# Altium PCB somiqboard.PcbDoc (part 7 of 10)
Units mm, origin at the board's own origin, x right, y up, seen from the top; angles counter-clockwise.
Board outline 110 x 96 mm, 4 copper layers (Top Layer, Ground_Plane, Power_Plane, Bottom Layer), stack 1.454 mm thick; 221 components, 356 nets, 1185 pads, 539 vias.
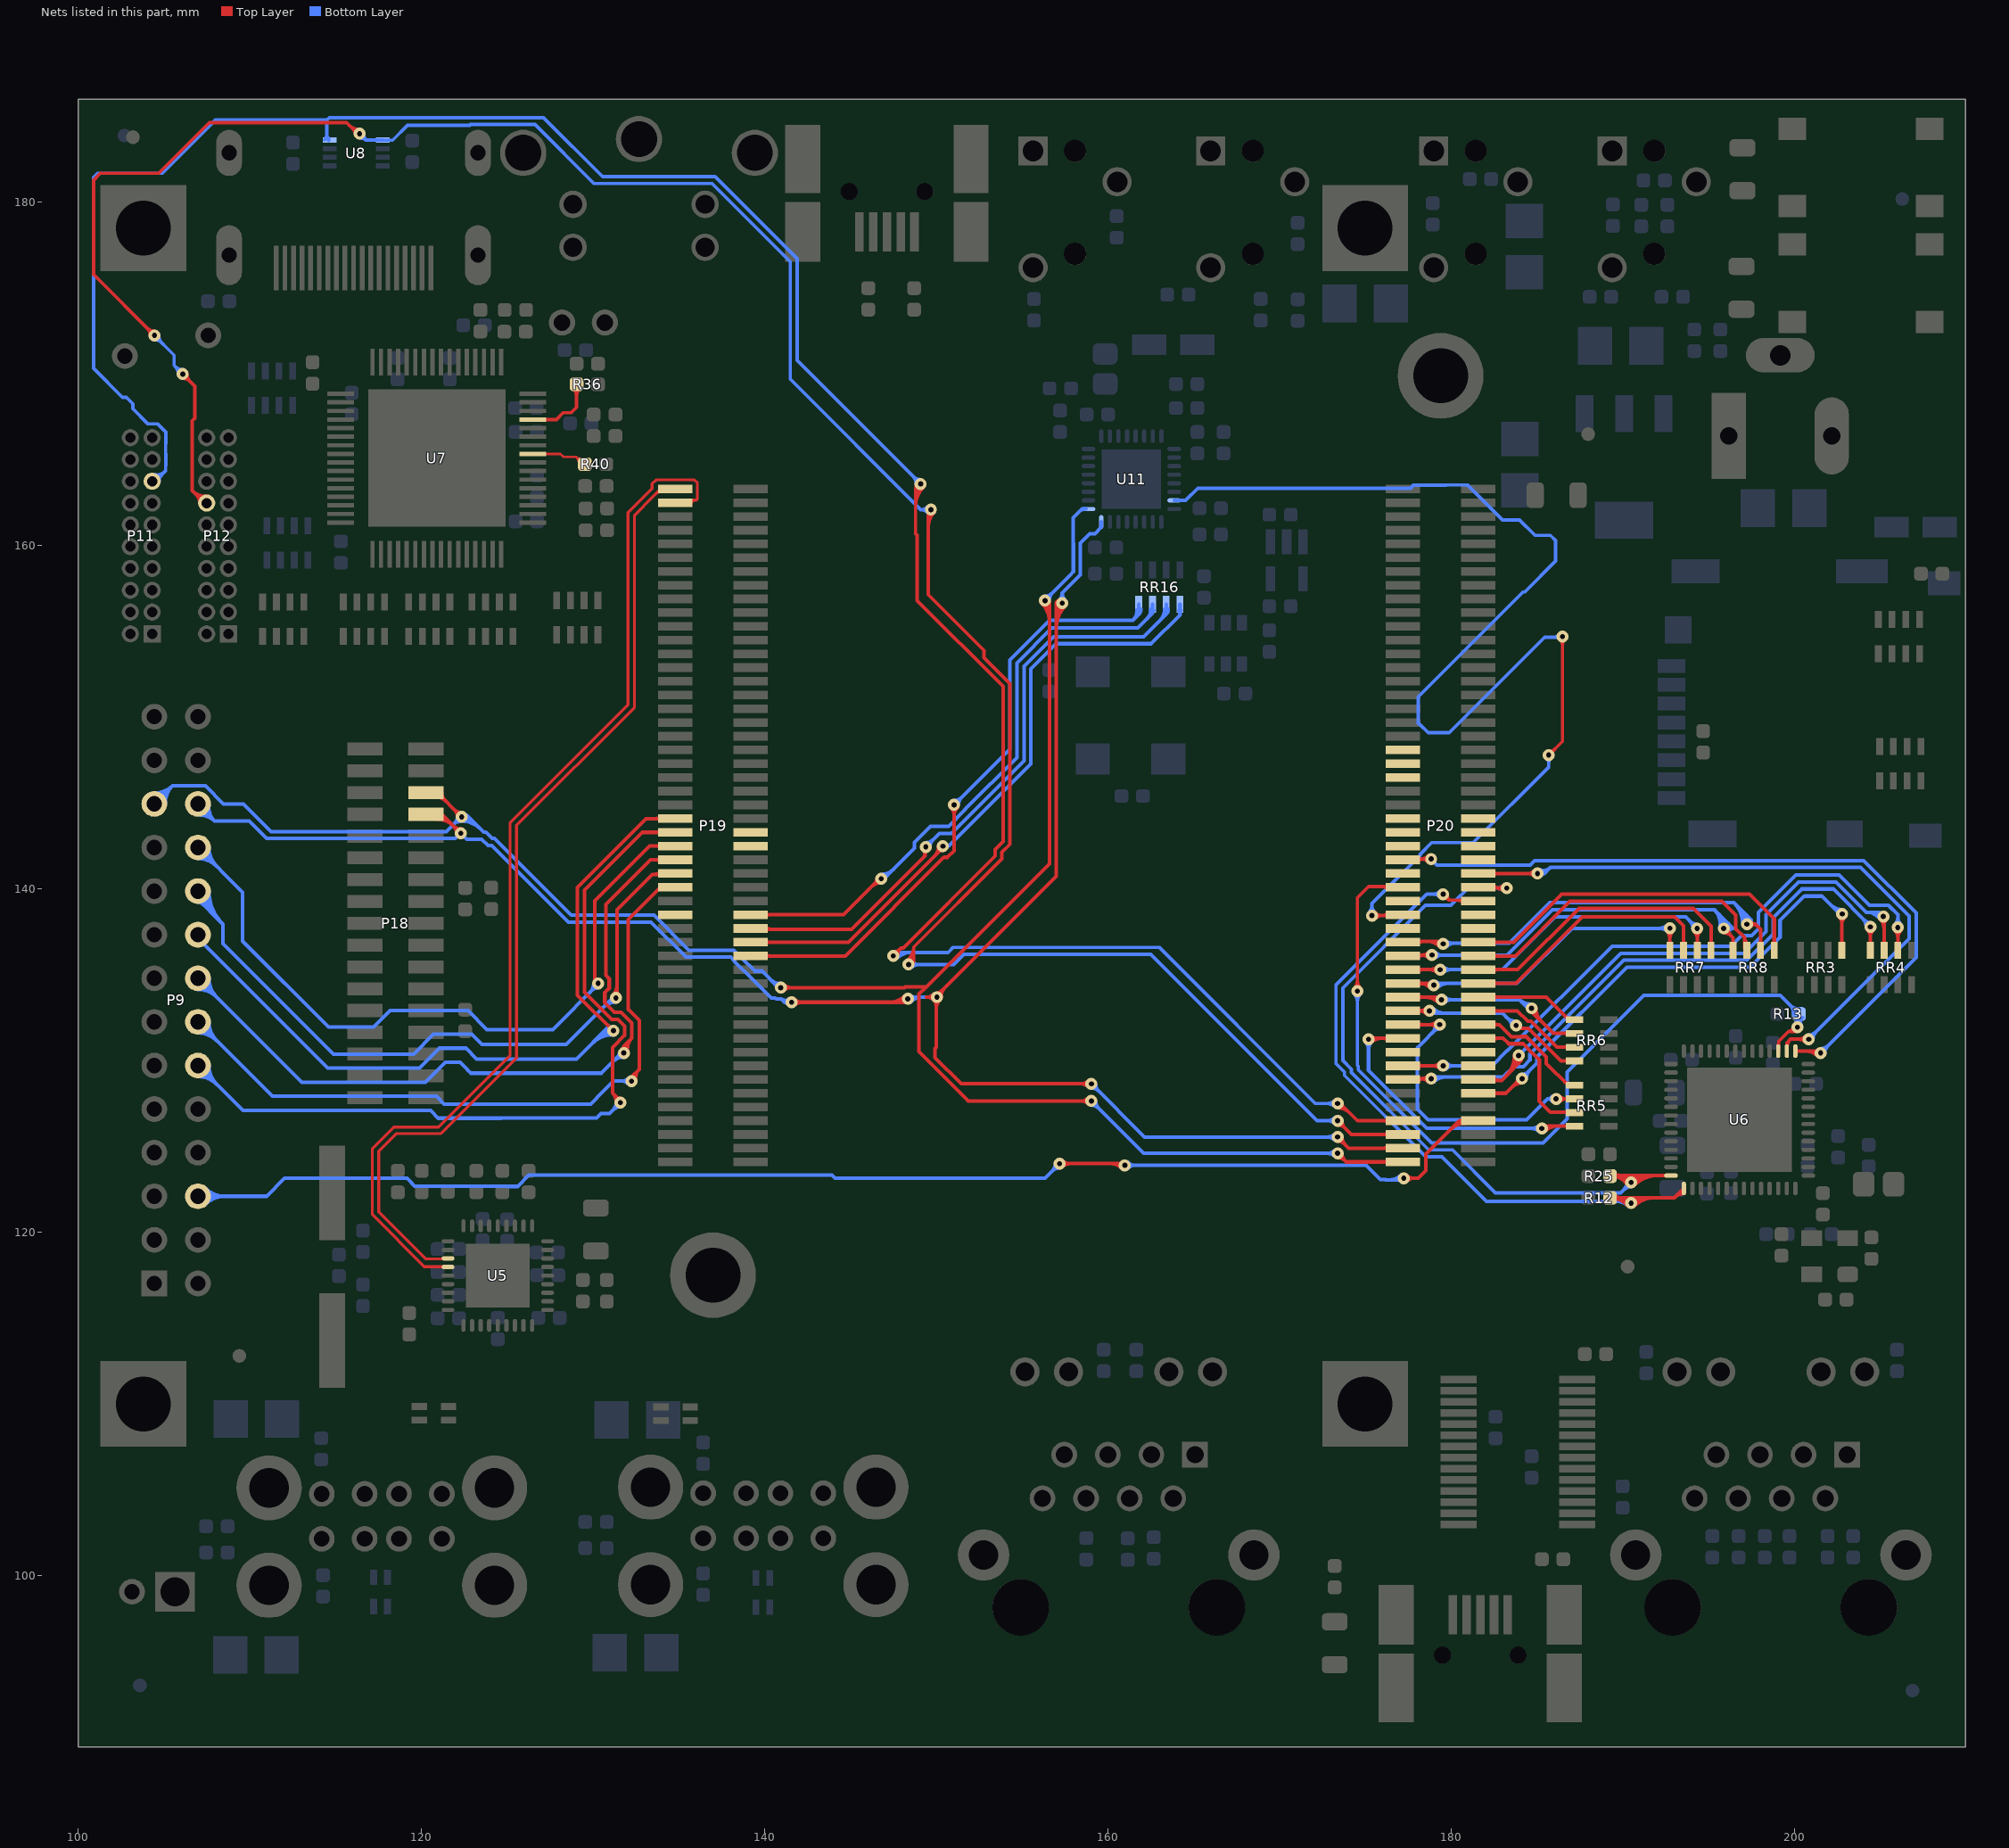
[diagram p9: the nets of this part, all layers, seen from the top]

## Via types
v1: diameter 0.7/0.7/0.7/0.7 (per signal layer), hole 0.3, Top Layer to Bottom Layer, tented both sides, 270 vias
v2: diameter 0.8, hole 0.3, Top Layer to Bottom Layer, tented both sides, 49 vias
v3: diameter 0.6/0.7/0.7/0.6 (per signal layer), hole 0.3, Top Layer to Bottom Layer, tented both sides, 47 vias
v4: diameter 0.6, hole 0.3, Top Layer to Bottom Layer, tented both sides, 43 vias
v5: diameter 1.1/1.1/1.1/1.1 (per signal layer), hole 0.6, Top Layer to Bottom Layer, tented both sides, 32 vias
v6: diameter 0.8/0.8/0.8/0.8 (per signal layer), hole 0.4, Top Layer to Bottom Layer, tented both sides, 31 vias
v7: diameter 0.9/0.9/0.9/0.9 (per signal layer), hole 0.5, Top Layer to Bottom Layer, tented both sides, 29 vias
v8: diameter 1.5/1.5/1.5/1.5 (per signal layer), hole 0.9, Top Layer to Bottom Layer, tented both sides, 14 vias
v9: diameter 1.2/1.2/1.2/1.2 (per signal layer), hole 0.6, Top Layer to Bottom Layer, tented both sides, 10 vias
v10: diameter 0.8/0.8/0.8/0.8 (per signal layer), hole 0.5, Top Layer to Bottom Layer, tented both sides, 6 vias
v11: diameter 1/1/1/1 (per signal layer), hole 0.5, Top Layer to Bottom Layer, tented both sides, 3 vias
v12: diameter 0.8/0.8/0.8/0.8 (per signal layer), hole 0.8, Top Layer to Bottom Layer, tented both sides, 2 vias
v13: diameter 1.2/1.2/1.2/1.2 (per signal layer), hole 1.2, Top Layer to Bottom Layer, tented both sides, 2 vias
v14: diameter 0.6/0.6/0.6/0.6 (per signal layer), hole 0.3, Top Layer to Bottom Layer, tented both sides, 1 vias

## Nets (pads, with @x,y where several pads share a name; then routed paths per layer and width w, separated by ;. In a path a pad name is that pad's centre, name@x,y a point inside that pad or via, vN(x,y) a via of type N, cw(c..) or ccw(c..) an arc to the next point about the centre after c; other vN are vias at no path point) (continued)
GPMC_A4: P20.89 RR3.5 | length 33.9
  Top Layer w0.21: P20.89@181.85,128.1 183.2,128.1 184.15,129.05 v1(184.15,128.95) ; P20.89@182.453,127.997 cw(c182.7,127.75) 182.7,128.1 cw(c182.7,128.45) P20.89@182.453,128.203 ; 183.561,128.461 cw(c184.15,127.872) v1@184.15,128.705 ; 183.802,128.702 ccw(c183.554,128.95) v1@183.905,128.95 ; v1@202.627,138.377 cw(c202.257,138.007) 202.78,138.007 ; RR3.5@202.713,136.796 ccw(c202.551,136.958) 202.78,136.958 ccw(c203.009,136.958) RR3.5@202.847,136.796 ; RR3.5@202.78,136.429 202.78,138.57 v1(202.8,138.55) ; 202.78,137.91 cw(c203.44,137.91) v1@202.973,138.377
  Bottom Layer w0.21: v1(184.15,128.95) 184.15,129.05 184.335,129.235 184.391,129.235 185.015,129.859 185.015,130.205 190.245,135.435 197.424,135.435 199.18,137.191 199.18,138.16 200.58,139.56 200.61,139.56 200.635,139.585 201.621,139.585 202.656,138.55 v1(202.8,138.55) ; v1@184.15,129.195 ccw(c184.15,129.68) 184.493,129.337 ; v1@184.395,128.95 cw(c185.092,128.95) 184.599,129.443 ; 202.136,139.07 ccw(c202.8,139.734) v1@202.8,138.795 ; 202.483,138.723 cw(c202.311,138.55) v1@202.555,138.55
GPMC_A5: P20.88 RR4.8 | length 40.6
  Top Layer w0.21: P20.88@176.9,129 176.95,128.95 v1(178.85,128.95) ; P20.88@178.053,128.797 cw(c178.421,128.429) 178.421,128.95 ; v1@178.677,128.777 ccw(c178.259,128.359) 178.259,128.95 ccw(c178.259,129.541) v1@178.677,129.123 ; v1@204.271,137.621 cw(c203.853,137.203) 204.444,137.203 cw(c205.035,137.203) v1@204.617,137.621 ; RR4.8@204.377,136.796 ccw(c204.215,136.958) 204.444,136.958 ccw(c204.673,136.958) RR4.8@204.511,136.796 ; RR4.8@204.444,136.429 v1(204.444,137.794)
  Bottom Layer w0.21: v1(178.85,128.95) 178.95,128.95 179.05,129.05 179.274,129.05 ; v1@179.023,128.777 cw(c179.671,128.129) 179.671,129.045 ; v1@179.089,128.894 cw(c179.279,128.85) 179.279,129.045 ; v1@179.09,128.9 cw(c179.274,128.862) 179.274,129.05 ; 179.2,129.05 cw(c179.2,129.3) v1@179.023,129.123 ; 203.999,138.278 cw(c203.515,137.794) v1@204.199,137.794 ; 204.091,138.185 ccw(c204.444,138.538) v1@204.444,138.039 ; v1(204.444,137.794) 204.444,137.832 202.276,140 200.45,140 200.42,139.97 200.41,139.97 198.77,138.33 198.77,137.36 197.255,135.845 190.075,135.845 184.605,130.375 184.605,130.028 184.221,129.645 183.645,129.645 183.045,129.045 179.279,129.045 ; v1@179.023,129.123 ccw(c179.212,129.312) 179.212,129.045 cw(c179.212,129.312) v1@179.023,129.123 ; 179.274,129.05 179.279,129.045
GPMC_A6: P20.87 RR4.7 | length 38.1
  Top Layer w0.21: P20.87@182,128.85 182.95,128.85 184.1,130 184.1,130.45 v1(183.95,130.3) ; P20.87@182.453,129.003 ccw(c182.821,129.371) 182.821,128.85 ; 183.213,129.113 ccw(c182.026,130.3) v1@183.705,130.3 ; 183.572,129.472 ccw(c182.743,130.3) v1@183.915,130.3 ; 183.93,129.83 ccw(c183.46,130.3) v1@184.125,130.3 ; v1@205.027,138.227 cw(c204.502,137.702) 205.244,137.702 ; RR4.7@205.177,136.796 ccw(c205.015,136.958) 205.244,136.958 ccw(c205.473,136.958) RR4.7@205.311,136.796 ; v1(205.2,138.4) 205.244,138.356 RR4.7@205.244,136.429 ; 205.244,137.915 cw(c205.685,137.915) v1@205.373,138.227
  Bottom Layer w0.21: v1(183.95,130.3) 189.905,136.255 197.085,136.255 198.36,137.53 198.36,138.499 200.271,140.41 202.446,140.41 204.21,138.646 ; 204.634,138.646 cw(c204.634,137.97) v1@205.172,138.379 ; v1@205.005,138.252 ccw(c204.21,137.648) 204.21,138.646 ; v1(205.2,138.4) 204.954,138.646 204.21,138.646
GPMC_A7: P20.86 RR4.6 | length 41.6
  Top Layer w0.21: P20.86@177.25,129.7 v1(179.55,129.7) ; P20.86@178.053,129.597 cw(c178.3,129.35) 178.3,129.7 cw(c178.3,130.05) P20.86@178.053,129.803 ; v1@179.377,129.527 ccw(c178.959,129.109) 178.959,129.7 ccw(c178.959,130.291) v1@179.377,129.873 ; v1@205.871,137.583 cw(c205.453,137.165) 206.044,137.165 cw(c206.635,137.165) v1@206.217,137.583 ; RR4.6@205.977,136.796 ccw(c205.815,136.958) 206.044,136.958 ccw(c206.273,136.958) RR4.6@206.111,136.796 ; RR4.6@206.044,136.429 v1(206.044,137.756)
  Bottom Layer w0.21: v1(179.55,129.7) 182.4,129.7 183.271,130.571 183.295,130.571 189.389,136.665 196.315,136.665 196.945,137.295 197.521,137.295 197.91,137.683 197.91,138.629 200.101,140.82 202.616,140.82 204.38,139.056 205.494,139.056 206.044,138.506 v1(206.044,137.756) ; v1@179.723,129.527 cw(c180.141,129.109) 180.141,129.7 cw(c180.141,130.291) v1@179.723,129.873 ; v1@205.871,137.929 ccw(c205.453,138.347) 206.044,138.347 ccw(c206.635,138.347) v1@206.217,137.929
GPMC_A8: P20.85
GPMC_A9: P20.84
GPMC_A10: P20.83
GPMC_ALE: P20.58
GPMC_CLE: P20.54
GPMC_CLK: P20.40
GPMC_D0: P20.82 RR5.8 | length 22.1
  Top Layer w0.21: v1(175.2,131.25) 175.25,131.3 P20.82@177.2,131.3 ; v1@175.373,131.077 cw(c175.912,130.538) 175.912,131.3 ; v1@175.373,131.423 ccw(c175.671,131.721) 175.671,131.3 ; P20.82@176.347,131.197 ccw(c176.1,130.95) 176.1,131.3 ccw(c176.1,131.65) P20.82@176.347,131.403 ; v1(185.3,126.05) 185.45,126.2 RR5.8@187.1,126.2 ; v1@185.325,126.025 cw(c185.747,125.603) 185.747,126.2 ; v1@185.473,125.877 cw(c186.254,125.096) 186.254,126.2 ; 186.612,126.2 cw(c186.612,125.882) RR5.8@186.837,126.107
  Bottom Layer w0.21: v1@175.027,131.077 cw(c174.609,130.659) 175.2,130.659 cw(c175.791,130.659) v1@175.373,131.077 ; v1(175.2,131.25) 175.2,129.443 178.593,126.05 v1(185.3,126.05) ; v1@185.127,125.877 ccw(c184.709,125.459) 184.709,126.05 ccw(c184.709,126.641) v1@185.127,126.223
GPMC_D1: P20.81 RR5.7 | length 9.6
  Top Layer w0.21: P20.81@181.6,131.3 183.044,131.3 183.359,130.985 184.191,130.985 184.755,130.421 184.779,130.421 185.15,130.05 185.15,127.65 185.8,127 RR5.7@187.2,127 ; P20.81@182.453,131.197 cw(c182.7,130.95) 182.7,131.3 cw(c182.7,131.65) P20.81@182.453,131.403 ; 186.612,127 cw(c186.612,126.682) RR5.7@186.837,126.907
GPMC_D2: P20.80 RR5.6 | length 21.9
  Top Layer w0.21: P20.80@177.25,132.15 177.3,132.1 v1(179.35,132.1) ; P20.80@178.053,131.997 cw(c178.3,131.75) 178.3,132.1 cw(c178.3,132.45) P20.80@178.053,132.203 ; v1@179.177,131.927 ccw(c178.759,131.509) 178.759,132.1 ccw(c178.759,132.691) v1@179.177,132.273 ; v1(186.126,127.774) RR5.6@187.204,127.774 ; v1@186.299,127.601 cw(c186.717,127.183) 186.717,127.774 cw(c186.717,128.365) v1@186.299,127.947 ; RR5.6@186.837,127.707 ccw(c186.675,127.545) 186.675,127.774 ccw(c186.675,128.003) RR5.6@186.837,127.841
  Bottom Layer w0.21: 178.896,131.596 ccw(c178.393,132.1) v1@179.105,132.1 ; 179.017,131.717 cw(c179.35,131.384) v1@179.35,131.855 ; v1(179.35,132.1) 179.35,132.05 178.05,130.75 178.05,127.173 178.678,126.545 184.41,126.545 185.64,127.774 ; v1@185.929,127.628 ccw(c185.64,127.414) 185.64,127.774 ; v1@185.929,127.92 cw(c185.64,128.134) 185.64,127.774 ; v1(186.126,127.774) 185.64,127.774
GPMC_D3: P20.79 RR5.5 | length 8.1
  Top Layer w0.21: P20.79@181.6,132.1 182.824,132.1 183.529,131.395 184.071,131.395 184.076,131.4 184.38,131.4 185.56,130.22 185.56,129.84 186.85,128.55 RR5.5@187.15,128.55 ; P20.79@182.453,131.997 cw(c182.7,131.75) 182.7,132.1 cw(c182.7,132.45) P20.79@182.453,132.203 ; 186.609,128.791 ccw(c186.904,129.087) RR5.5@186.904,128.669
GPMC_D4: P20.78 RR6.8 | length 15.4
  Top Layer w0.21: P20.78@177.1,132.95 177.15,132.9 v1(178.75,132.9) ; P20.78@178.053,132.797 cw(c178.3,132.55) 178.3,132.9 cw(c178.3,133.25) P20.78@178.053,133.003 ; v1@178.577,132.727 ccw(c178.159,132.309) 178.159,132.9 ccw(c178.159,133.491) v1@178.577,133.073 ; v1(183.8,132.05) 183.965,131.885 184.505,131.885 186.406,129.984 RR6.8@187.204,129.984 ; RR6.8@186.837,129.917 ccw(c186.675,129.755) 186.675,129.984 ccw(c186.675,130.213) RR6.8@186.837,130.051
  Bottom Layer w0.21: v1(178.75,132.9) 178.895,132.755 182.995,132.755 183.7,132.05 v1(183.8,132.05) ; v1@178.775,132.925 ccw(c179.185,133.335) 179.185,132.755 ; v1@178.923,133.073 ccw(c179.692,133.842) 179.692,132.755 ; 183.211,132.539 ccw(c183.8,133.128) v1@183.8,132.295 ; 183.452,132.298 cw(c183.205,132.05) v1@183.555,132.05
GPMC_D5: P20.77 RR6.7 | length 7.2
  Top Layer w0.21: P20.77@181.75,132.9 183.876,132.9 184.481,132.295 184.675,132.295 186.186,130.784 RR6.7@187.204,130.784 ; P20.77@182.453,132.797 cw(c182.7,132.55) 182.7,132.9 cw(c182.7,133.25) P20.77@182.453,133.003 ; RR6.7@186.837,130.717 ccw(c186.675,130.555) 186.675,130.784 ccw(c186.675,131.013) RR6.7@186.837,130.851
GPMC_D6: P20.76 RR6.6 | length 16.8
  Top Layer w0.21: P20.76@177.15,133.7 179.3,133.7 v1(179.45,133.55) ; P20.76@178.053,133.597 cw(c178.3,133.35) 178.3,133.7 cw(c178.3,134.05) P20.76@178.053,133.803 ; 178.496,133.7 cw(c178.496,132.596) v1@179.277,133.377 ; 179.003,133.7 cw(c179.003,133.103) v1@179.425,133.525 ; v1(184.7,133.05) 184.6,132.95 185.966,131.584 RR6.6@187.204,131.584 ; v1@184.735,133.05 ccw(c185.3,133.05) 184.9,132.65 ; v1@184.945,133.05 ccw(c186.017,133.05) 185.259,132.291 ; RR6.6@186.837,131.517 ccw(c186.675,131.355) 186.675,131.584 ccw(c186.675,131.813) RR6.6@186.837,131.651
  Bottom Layer w0.21: v1(179.45,133.55) 184,133.55 ; v1@179.623,133.377 cw(c180.041,132.959) 180.041,133.55 cw(c180.041,134.141) v1@179.623,133.723 ; 184.326,133.224 ccw(c184.665,133.562) v1@184.697,133.085 ; v1@184.683,133.294 cw(c184.623,134.173) 184,133.55 ; v1(184.7,133.05) 184.6,132.95 184,133.55
GPMC_D7: P20.75 RR6.5 | length 6.8
  Top Layer w0.21: P20.75@181.75,133.7 181.755,133.705 185.545,133.705 186.866,132.384 RR6.5@187.204,132.384 ; P20.75@182.453,133.597 cw(c182.711,133.339) 182.711,133.705 ; P20.75@182.453,133.803 ccw(c182.689,134.039) 182.689,133.705 ; 186.677,132.573 ccw(c186.904,132.8) RR6.5@186.904,132.479
GPMC_D8: P20.74 RR7.8 | length 22.9
  Top Layer w0.21: P20.74@177.4,134.5 v1@179.05,134.5 ; P20.74@178.053,134.397 cw(c178.3,134.15) 178.3,134.5 cw(c178.3,134.85) P20.74@178.053,134.603 ; P20.74@178.166,134.5 cw(c178.166,133.566) v1@178.826,134.226 ; 178.65,134.5 ccw(c178.65,134.749) v1@178.826,134.573 ; v1(179,134.4) 179.05,134.4 v1@179.05,134.5 ; v1@192.587,137.537 cw(c192.169,137.119) 192.76,137.119 cw(c193.351,137.119) v1@192.933,137.537 ; RR7.8@192.693,136.796 ccw(c192.531,136.958) 192.76,136.958 ccw(c192.989,136.958) RR7.8@192.827,136.796 ; RR7.8@192.76,136.429 v1(192.76,137.71) v1@192.76,137.74
  Bottom Layer w0.21: v1(179,134.4) 179.05,134.4 v1@179.05,134.5 ; v1@179.05,134.5 183.85,134.5 187.06,137.71 v1(192.76,137.71) ; v1@179.173,134.226 cw(c179.833,133.566) 179.833,134.5 ; v1@179.173,134.573 ccw(c179.349,134.749) 179.349,134.5 ; v1@192.587,137.537 ccw(c192.169,137.119) 192.169,137.71 ccw(c192.169,138.301) v1@192.587,137.883
GPMC_D9: P20.73 RR7.7 | length 16
  Top Layer w0.21: P20.73@181.6,134.5 183.8,134.5 ; P20.73@182.453,134.397 cw(c182.7,134.15) 182.7,134.5 cw(c182.7,134.85) P20.73@182.453,134.603 ; 183.85,134.55 187.665,138.365 193.031,138.365 193.55,137.846 193.55,136.439 RR7.7@193.56,136.429 ; RR7.7@193.493,136.796 ccw(c193.355,136.934) 193.55,136.934 ; 193.55,136.982 ccw(c193.814,136.982) RR7.7@193.627,136.796
GPMC_D10: P20.72 RR7.6 | length 24.8
  Top Layer w0.21: P20.72@177.35,135.3 v1(179.373,135.3) ; P20.72@178.053,135.197 cw(c178.3,134.95) 178.3,135.3 cw(c178.3,135.65) P20.72@178.053,135.403 ; 178.78,135.3 cw(c178.78,134.708) v1@179.199,135.126 ; 178.782,135.3 ccw(c178.782,135.891) v1@179.199,135.473 ; v1@194.177,137.527 cw(c193.734,137.084) 194.36,137.084 ; RR7.6@194.293,136.796 ccw(c194.131,136.958) 194.36,136.958 ccw(c194.589,136.958) RR7.6@194.427,136.796 ; v1(194.35,137.7) 194.36,137.69 RR7.6@194.36,136.429 ; 194.36,137.133 cw(c194.917,137.133) v1@194.523,137.527
  Bottom Layer w0.21: v1@179.2,135.3 183.01,135.3 186.075,138.365 193.685,138.365 v1(194.35,137.7) ; v1@179.2,135.3 v1(179.373,135.3) ; v1@179.546,135.126 cw(c179.965,134.708) 179.965,135.3 ; v1@179.546,135.473 ccw(c179.963,135.891) 179.963,135.3 ; v1@194.105,137.7 ccw(c193.514,137.7) 193.932,138.118 ccw(c194.35,138.536) v1@194.35,137.945
GPMC_D11: P20.71 RR7.5 | length 17.6
  Top Layer w0.21: P20.71@181.8,135.3 183.9,135.3 187.48,138.88 194.12,138.88 195.16,137.84 RR7.5@195.16,136.429 ; P20.71@182.453,135.197 cw(c182.7,134.95) 182.7,135.3 cw(c182.7,135.65) P20.71@182.453,135.403 ; RR7.5@195.093,136.796 ccw(c194.931,136.958) 195.16,136.958 ccw(c195.389,136.958) RR7.5@195.227,136.796
GPMC_D12: P20.70 RR8.8 | length 30.6
  Top Layer w0.21: P20.70@177,136.15 v1@178.95,136.15 ; P20.70@178.053,135.997 cw(c178.421,135.629) 178.421,136.15 ; 178.308,136.15 cw(c178.308,135.558) v1@178.726,135.976 ; 178.309,136.15 ccw(c178.309,136.741) v1@178.726,136.323 ; v1(178.9,136.15) v1@178.95,136.15 ; v1@195.9,137.455 cw(c195.9,136.863) 196.318,137.281 cw(c196.736,137.7) v1@196.145,137.7 ; v1(195.9,137.7) 196.435,137.165 196.435,136.437 RR8.8@196.443,136.429 ; RR8.8@196.376,136.796 ccw(c196.234,136.938) 196.435,136.938 ; 196.435,136.979 ccw(c196.693,136.979) RR8.8@196.51,136.796
  Bottom Layer w0.21: v1(178.9,136.15) 178.904,136.145 183.275,136.145 185.92,138.79 195.36,138.79 ; v1@179.073,135.976 cw(c179.48,135.57) 179.48,136.145 ; v1@179.073,136.323 ccw(c179.503,136.753) 179.503,136.145 ; 195.63,138.52 cw(c195.009,137.9) v1@195.865,137.707 ; v1@195.661,137.753 ccw(c194.569,137.999) 195.36,138.79 ; v1(195.9,137.7) 196.45,137.7 ; 195.9,138.25 cw(c195.45,137.801) v1@196.07,137.661 ; v1@196.082,137.536 cw(c196.45,137.205) 196.45,137.7 ; v1@196.082,137.864 ccw(c196.45,138.195) 196.45,137.7 ; 196.169,137.981 cw(c195.89,137.702) 196.275,137.615 ; 195.36,138.79 196.45,137.7
GPMC_D13: P20.69 RR8.7 | length 20
  Top Layer w0.21: P20.69@181.5,136.1 183.75,136.1 186.94,139.29 195.786,139.29 196.595,138.482 196.595,137.678 197.105,137.168 ; P20.69@182.453,135.997 cw(c182.7,135.75) 182.7,136.1 cw(c182.7,136.45) P20.69@182.453,136.203 ; RR8.7@197.243,136.429 197.105,136.567 197.105,137.168 ; RR8.7@197.296,136.808 cw(c197.54,137.168) 197.105,137.168
GPMC_D14: P20.68 RR8.6 | length 31.3
  Top Layer w0.21: P20.68@177.3,136.95 179.15,136.95 ; P20.68@178.053,136.797 cw(c178.421,136.429) 178.421,136.95 ; 178.596,136.95 cw(c178.596,135.846) v1@179.377,136.627 ; 179.103,136.95 cw(c179.103,136.353) v1@179.525,136.775 ; v1@179.305,136.797 ccw(c179.15,136.795) 179.15,136.95 ; v1(179.55,136.8) 179.545,136.805 179.295,136.805 179.15,136.95 ; v1(197.25,137.95) 197.75,137.95 ; v1@197.443,137.799 cw(c197.75,137.561) 197.75,137.95 ; v1@197.443,138.1 ccw(c197.75,138.339) 197.75,137.95 ; RR8.6@197.976,136.796 ccw(c197.814,136.958) 198.043,136.958 ccw(c198.272,136.958) RR8.6@198.11,136.796 ; RR8.6@198.043,136.429 198.043,137.657 197.75,137.95
  Bottom Layer w0.21: v1(179.55,136.8) 179.6,136.85 183.4,136.85 185.75,139.2 196.5,139.2 ; v1@179.723,136.627 cw(c180.262,136.088) 180.262,136.85 ; v1@179.723,136.973 ccw(c180.021,137.271) 180.021,136.85 ; 196.851,138.849 cw(c195.971,137.97) v1@197.215,137.95 ; v1@197.005,137.954 ccw(c195.281,137.981) 196.5,139.2 ; 197.201,138.499 cw(c196.661,137.959) v1@197.425,137.947 ; v1(197.25,137.95) 197.5,137.95 197.5,138.2 196.5,139.2
GPMC_D15: P20.67 RR8.5 | length 21.4
  Top Layer w0.21: P20.67@181.95,136.9 183.65,136.9 186.45,139.7 197.4,139.7 198.843,138.257 RR8.5@198.843,136.429 ; P20.67@182.453,136.797 cw(c182.7,136.55) 182.7,136.9 cw(c182.7,137.25) P20.67@182.453,137.003 ; RR8.5@198.776,136.796 ccw(c198.614,136.958) 198.843,136.958 ccw(c199.072,136.958) RR8.5@198.91,136.796
GPMC_NBE1: P20.51
GPMC_NCS0: P20.63
GPMC_NCS1: P20.64 U11.31 | length 78.3
  Top Layer w0.2: v1(175.4,138.45) 177,138.45 P20.64@177.1,138.55 ; v1@175.577,138.273 cw(c176.004,137.846) 176.004,138.45 cw(c176.004,139.054) v1@175.577,138.627 ; 175.967,138.45 ccw(c175.967,138.983) P20.64@176.344,138.606 ; v3(185.7,147.8) 186.5,148.6 v3(186.5,154.7) ; v3@185.7,148 ccw(c185.7,148.483) 186.041,148.141 ccw(c186.383,147.8) v3@185.9,147.8 ; v3@186.359,154.559 cw(c186.017,154.217) 186.5,154.217 cw(c186.983,154.217) v3@186.641,154.559
  Bottom Layer w0.2: U11.31@163.877,162.635 164.535,162.635 165.25,163.35 177.649,163.35 177.819,163.52 179.705,163.52 179.72,163.535 180.88,163.535 180.895,163.52 180.98,163.52 181,163.5 183,161.5 184,161.5 184.9,160.6 185.8,160.6 186.1,160.3 186.1,159.1 184.3,157.3 184.2,157.3 178.1,151.2 178.1,149.65 178.131,149.65 178.681,149.1 179.902,149.1 185.464,154.662 186.462,154.662 v3(186.5,154.7) ; v1@175.223,138.627 ccw(c174.796,139.054) 175.4,139.054 ccw(c176.004,139.054) v1@175.577,138.627 ; v1(175.4,138.45) 175.4,139.15 178.2,141.95 178.2,142.019 178.881,142.7 181.3,142.7 185.7,147.1 v3(185.7,147.8) ; v3@185.559,147.659 cw(c185.217,147.317) 185.7,147.317 cw(c186.183,147.317) v3@185.841,147.659 ; 185.925,154.662 ccw(c185.925,155.275) v3@186.359,154.841 ; 186.11,154.662 cw(c186.11,154.31) v3@186.359,154.559
GPMC_NCS2: P20.65
GPMC_NCS3: P20.66
GPMC_NCS4: P20.62
GPMC_NCS5: P20.60 R13.1 U6.17 | length 56.2
  Top Layer w0.2: v1@174.373,134.227 ccw(c173.946,134.654) 174.55,134.654 ccw(c175.154,134.654) v1@174.727,134.227 ; v1(174.55,134.05) 174.55,139.5 175.2,140.15 P20.60@177.05,140.15 ; 175.967,140.15 cw(c175.967,139.617) P20.60@176.344,139.994 ; U6.17@199.056,130.848 ccw(c198.951,130.953) 199.1,130.953 ; U6.17@199.074,130.555 199.1,130.581 199.1,131.123 199.677,131.7 ; 199.886,131.7 ccw(c199.886,131.964) v1@200.15,131.952 ; v1@199.95,131.961 cw(c199.677,131.973) 199.677,131.7 ; v1@200.2,131.8 v1(200.2,131.95) ; v1@200.2,131.8 200.1,131.7 199.677,131.7
  Bottom Layer w0.2: v1@174.373,133.873 cw(c173.946,133.446) 174.55,133.446 cw(c175.154,133.446) v1@174.727,133.873 ; v1(174.55,134.05) 174.55,129.721 174.6,129.671 174.6,129.47 178.87,125.2 185.369,125.2 186.776,126.607 186.776,129.326 191.25,133.8 199.194,133.8 R13.1@200.279,132.715 ; R13.1@199.979,132.715 ccw(c199.255,132.715) 199.767,133.227 ccw(c200.279,133.739) R13.1@200.279,133.015 ; v1@200.023,132.127 ccw(c199.474,132.675) R13.1@200.25,132.675 ; R13.1@200.067,132.503 cw(c199.625,132.061) v1@200.25,132.061 ; v1@200.144,132.193 ccw(c200.071,132.511) R13.1@200.385,132.426 ; v1@200.2,131.8 v1(200.2,131.95) ; v1@200.2,131.8 200.25,131.85 R13.1@200.25,132.7 ; v1@200.25,131.921 cw(c201.073,131.921) R13.1@200.491,132.503 ; R13.1@200.25,132.432 ccw(c200.681,132.432) v1@200.376,132.127 ; R13.1@200.375,132.387 ccw(c200.773,132.281) v1@200.416,132.075
GPMC_NCS6: P20.61 R12.1 U6.43 | length 51.1
  Top Layer w0.2: v1(179.55,139.7) 179.9,139.35 ; v1@179.587,139.453 cw(c179.642,139.092) 179.9,139.35 ; v1@179.797,139.663 ccw(c180.158,139.608) 179.9,139.35 ; 180.367,139.35 cw(c180.367,138.817) P20.61@180.744,139.194 ; P20.61@181.55,139.35 179.9,139.35 ; R12.1@189.479,121.794 cw(c189.977,121.296) 189.977,122 ; R12.1@189.479,122.218 ccw(c190.006,122.745) 190.006,122 ; 189.736,122 cw(c189.736,121.042) v1@190.462,121.667 ; 190.173,122 cw(c190.173,121.418) v1@190.614,121.798 ; v1@190.311,121.537 ccw(c189.3,120.666) 189.3,122 v1@190.5,122 ; v1@190.394,121.806 cw(c190.862,121.338) 190.862,122 ; v1@190.5,121.7 v1@190.5,122 ; v1@190.535,121.665 cw(c191.345,120.855) 191.345,122 ; v1@190.677,121.523 cw(c191.828,120.372) 191.828,122 ; 193.062,122.043 cw(c193.574,121.531) U6.43@193.574,122.255 ; 193.403,122.384 cw(c193.574,122.214) U6.43@193.574,122.455 ; U6.43@193.574,122.555 193.019,122 v1@190.5,122
  Bottom Layer w0.2: v1@179.373,139.523 ccw(c178.946,139.096) 178.946,139.7 ccw(c178.946,140.304) v1@179.373,139.877 ; v1(179.55,139.7) 178.6,139.7 173.3,134.4 173.3,129.84 173.8,129.34 173.8,129.139 178.539,124.4 179.469,124.4 182.069,121.8 190.4,121.8 v1(190.5,121.7) ; 189.655,121.8 cw(c189.655,120.855) v1@190.323,121.523 ; v1@190.323,121.877 cw(c190.138,122.062) 190.138,121.8 cw(c190.138,121.338) v1@190.465,121.665
GPMC_NCS7: P20.59 R25.1 U6.42 | length 54.3
  Top Layer w0.2: P20.59@181.65,140.05 v1(183.25,140.05) ; P20.59@182.456,140.206 ccw(c182.833,140.583) 182.833,140.05 ; v1@183.073,139.873 ccw(c182.646,139.446) 182.646,140.05 ccw(c182.646,140.654) v1@183.073,140.227 ; R25.1@189.25,123.3 R25.1@189.255,123.305 ; R25.1@189.479,123.064 cw(c190.061,122.482) 190.061,123.305 ; R25.1@189.479,123.488 ccw(c189.921,123.93) 189.921,123.305 ; R25.1@189.635,123.305 cw(c189.635,122.306) v1@190.459,122.872 ; 190.015,123.305 cw(c190.015,122.567) v1@190.624,122.985 ; v1@190.253,123.147 cw(c190.633,122.767) 190.633,123.305 ; v1@190.294,122.758 ccw(c189.255,122.044) R25.1@189.255,123.305 ; v1@190.388,123.123 ccw(c190.296,123.305) 190.5,123.305 ; v1@190.394,123.006 cw(c191.116,122.284) 191.116,123.305 ; 190.395,123.305 cw(c190.395,122.828) 190.788,123.098 ; v1(190.5,122.9) 190.5,123.305 ; v1@190.535,122.865 cw(c191.598,121.802) 191.598,123.305 ; v1@190.612,123.124 cw(c190.702,123.305) 190.5,123.305 ; v1@190.677,122.723 cw(c192.081,121.319) 192.081,123.305 ; U6.42@192.824,123.305 190.5,123.305 ; R25.1@189.255,123.305 190.5,123.305
  Bottom Layer w0.2: v1@183.073,139.873 ccw(c182.646,139.446) 182.646,140.05 ccw(c182.646,140.654) v1@183.073,140.227 ; v1(183.25,140.05) 181,140.05 180.231,139.281 180,139.05 178.516,139.05 173.7,134.234 173.7,130.006 174.2,129.506 174.2,129.305 178.705,124.8 180.1,124.8 182.6,122.3 189.9,122.3 v1(190.5,122.9) ; v1@190.25,122.9 cw(c189.646,122.9) 190.073,122.473 cw(c190.5,122.046) v1@190.5,122.65
GPMC_NOE: P20.56 U6.15 | length 47
  Top Layer w0.21: P20.56@177.15,141.75 v1(178.85,141.75) ; P20.56@178.053,141.597 cw(c178.421,141.229) 178.421,141.75 ; v1@178.677,141.577 ccw(c178.259,141.159) 178.259,141.75 ccw(c178.259,142.341) v1@178.677,141.923 ; U6.15@200.074,130.555 201.295,130.555 201.4,130.45 v1(201.55,130.45) ; 200.705,130.555 cw(c200.705,129.605) v1@201.377,130.277 ; v1@201.377,130.623 cw(c201.212,130.788) 201.212,130.555 cw(c201.212,130.112) v1@201.525,130.425
  Bottom Layer w0.21: v1(178.85,141.75) 179.2,141.4 184.624,141.4 184.884,141.66 204.05,141.66 207.109,138.601 207.109,136.009 v1(201.55,130.45) ; v1@201.55,130.695 ccw(c201.55,131.286) 201.968,130.868 ccw(c202.386,130.45) v1@201.795,130.45
GPMC_NWE: P20.57 U6.16 | length 43.5
  Top Layer w0.21: P20.57@181.45,140.9 v1(185.05,140.9) ; P20.57@182.453,140.797 cw(c182.7,140.55) 182.7,140.9 cw(c182.7,141.25) P20.57@182.453,141.003 ; v1@184.877,140.727 ccw(c184.459,140.309) 184.459,140.9 ccw(c184.459,141.491) v1@184.877,141.073 ; U6.16@199.574,130.555 199.574,131.024 199.8,131.25 199.886,131.25 199.896,131.26 200.252,131.26 200.262,131.25 ; U6.16@199.594,130.83 cw(c200.111,130.83) 199.745,131.195 ; v1@200.676,131.078 ccw(c200.262,130.667) 200.262,131.25 ; v1@200.676,131.422 cw(c200.262,131.833) 200.262,131.25 ; v1(200.85,131.25) 200.262,131.25
  Bottom Layer w0.21: v1(185.05,140.9) 185.45,140.9 ; v1@185.064,140.932 ccw(c185.25,141.363) 185.581,141.031 ; v1@185.147,141.125 ccw(c185.381,141.669) 185.8,141.25 ; v1@185.268,140.789 cw(c185.45,140.696) 185.45,140.9 ; v1@185.268,141.011 ccw(c185.45,141.104) 185.45,140.9 ; v1(200.85,131.25) 206.699,137.099 206.699,138.431 203.88,141.25 185.8,141.25 ; v1@200.85,131.495 ccw(c200.85,132.086) 201.268,131.668 ccw(c201.686,131.25) v1@201.095,131.25 ; 185.45,140.9 185.8,141.25
GPMC_NWP: P20.49
GPMC_WAIT0: P20.52
GPMC_WAIT1: P20.53
GPMC_WAIT2: P20.55
GPMC_WAIT3: P20.50
HDQ_SIO: P19.64
HSUSB1_D_N: P19.2 U5.30 | length 57.6
  Top Layer w0.173: 121.157,118.45 ccw(c121.157,118.628) U5.30@121.283,118.502 ; U5.30@121.56,118.475 121.535,118.45 120.25,118.45 117.523,121.177 117.523,124.723 118.55,125.75 121.15,125.75 125.55,130.15 125.55,143.71 132.423,150.583 132.423,161.773 133.513,162.863 133.513,162.869 133.681,163.036 133.686,163.036 ; P19.2@134.02,163.139 ccw(c133.95,162.773) 133.687,163.037 ; P19.2@134.8,163.136 135.064,163.136 134.9,163.3 133.945,163.3 133.823,163.178 133.823,163.173 133.686,163.036
HSUSB1_D_P: P19.4 U5.31 | length 62.7
  Top Layer w0.173: 121.157,118 cw(c121.157,117.822) U5.31@121.283,117.948 ; U5.31@121.56,117.975 121.535,118 120.173,118 117.15,121.023 117.15,124.877 118.395,126.123 120.995,126.123 125.177,130.305 125.177,143.865 132.05,150.738 132.05,161.927 133.141,163.018 133.141,163.023 133.45,163.333 133.45,163.605 133.681,163.836 135.919,163.836 136.086,163.669 136.086,162.736 136.013,162.663 ; P19.4@134.536,162.663 136.013,162.663 ; P19.4@135.541,162.503 cw(c135.768,162.422) P19.4@135.768,162.663 ; P19.4@135.704,162.445 cw(c136.013,162.335) 136.013,162.663
HTPLG: R40.1 U7.9 | length 4.3
  Top Layer w0.15: U7.9@126.504,165.35 128.113,165.35 128.289,165.175 129.025,165.175 ; 129.033,165.167 cw(c128.613,164.747) R40.1@129.207,164.747 ; R40.1@129.209,164.991 ccw(c129.413,165.194) R40.1@129.487,164.916 ; R40.1@129.4,164.8 129.025,165.175 ; R40.1@129.448,165.061 cw(c129.335,165.485) 129.025,165.175
I2C1_SCL: P19.53
I2C1_SDA: P19.51
I2C2_SCL: P9.24 P18.8 P20.98 U11.8 | length 138.5
  Top Layer w0.21: P18.8@120.266,144.349 P18.8@120.351,144.349 ; P18.8@120.35,144.35 P18.8@120.351,144.349 ; P18.8@120.911,144.074 cw(c120.911,142.71) 121.876,143.674 ; P18.8@120.911,144.284 cw(c120.911,143.427) 121.517,144.033 ; v1@122.055,143.25 ccw(c121.464,143.25) 121.882,143.668 ccw(c122.3,144.086) v1@122.3,143.495 ; v1(122.3,143.25) 121.201,144.349 P18.8@120.351,144.349 ; v1(141.581,133.4) v1@148.15,133.4 ; v1@141.754,133.227 cw(c142.172,132.809) 142.172,133.4 cw(c142.172,133.991) v1@141.754,133.573 ; 147.276,133.4 ccw(c147.276,134.674) v1@148.177,133.773 ; 147.783,133.4 ccw(c147.783,134.167) v1@148.325,133.625 ; 149.45,133.7 v1@149.956,133.7 ; v1@149.877,133.873 cw(c149.459,134.291) 149.459,133.7 cw(c149.459,133.109) 149.877,133.527 cw(c149.579,133.229) 150,133.229 ; 150,132.988 cw(c150.762,132.988) v1@150.223,133.527 ; v1(150.05,133.7) v1@149.956,133.7 ; v1@150.05,133.945 ccw(c150.05,134.31) 150.308,134.052 ; v1@150.295,133.7 cw(c151.113,133.7) 150.535,134.278 ; 157.01,155.238 cw(c158.761,155.238) v1@157.523,156.476 ; 157.01,155.745 cw(c158.254,155.745) v1@157.374,156.625 ; 157.01,156.252 cw(c157.747,156.252) v1@157.226,156.773 ; v1@157.11,156.8 157.01,156.7 157.01,141.296 157,141.286 157,140.744 v1@149.956,133.7 ; v1@158.877,128.477 ccw(c158.459,128.059) 158.459,128.65 ccw(c158.459,129.241) v1@158.877,128.823 ; v1(159.05,128.65) 151.474,128.65 149.945,130.179 149.945,130.721 150,130.776 150,133.656 v1@149.956,133.7 ; v1@173.4,125.305 cw(c173.4,124.714) 173.818,125.132 cw(c174.236,125.55) v1@173.645,125.55 ; v1(173.4,125.55) 174.05,124.9 P20.98@177.2,124.9 ; P20.98@176.347,124.797 ccw(c176.1,124.55) 176.1,124.9 ccw(c176.1,125.25) P20.98@176.347,125.003
  Bottom Layer w0.21: P9.24@106.985,144.958 P9.24@107.022,144.922 ; P9.24@107,144.9 107.945,143.955 ; P9.24@107.006,144.524 cw(c107.045,143.725) 107.61,144.29 ; P9.24@107.016,144.314 cw(c107.075,143.086) 107.945,143.955 ; P9.24@107.417,144.906 ccw(c108.192,144.812) 107.64,144.26 ; P9.24@107.625,144.881 ccw(c108.736,144.746) 107.945,143.955 ; 139.226,134.81 138.278,135.758 138.278,135.788 138.038,136.028 135.428,136.028 133.391,138.065 128.576,138.065 124.106,142.535 123.891,142.535 123.521,142.905 122.645,142.905 v1(122.3,143.25) 121.99,142.94 110.986,142.94 109.971,143.955 107.945,143.955 ; 139.24,134.81 140.395,133.655 140.619,133.655 ; 140.679,133.595 140.981,133.595 ; 141.138,133.438 ccw(c141.354,133.654) v1@141.557,133.426 ; v1@141.364,133.286 ccw(c141.176,133.188) 141.176,133.4 ; v1@141.364,133.514 cw(c141.176,133.612) 141.176,133.4 ; v1@141.417,133.583 cw(c141.206,133.82) 140.981,133.595 ; v1(141.581,133.4) 141.176,133.4 ; v1@148.45,133.7 v1(150.05,133.7) ; v1@148.523,133.427 cw(c149.183,132.767) 149.183,133.7 ; v1@148.523,133.773 ccw(c148.7,133.95) 148.7,133.7 ; v1@149.877,133.527 ccw(c149.459,133.109) 149.459,133.7 ccw(c149.459,134.291) v1@149.877,133.873 ; v1@157.176,156.823 ccw(c156.758,157.241) 157.35,157.241 ccw(c157.941,157.241) v1@157.523,156.823 ; v1(157.35,156.65) 157.35,157.25 157.97,157.87 158.41,158.31 158.41,160.159 158.951,160.7 159.25,160.7 159.627,161.077 U11.8@159.627,161.385 ; v1@159.05,128.405 cw(c159.05,127.814) 159.468,128.232 cw(c159.886,128.65) v1@159.295,128.65 ; v1(159.05,128.65) 162.15,125.55 v1(173.4,125.55) ; v1@173.227,125.377 ccw(c172.809,124.959) 172.809,125.55 ccw(c172.809,126.141) v1@173.227,125.723 ; 140.981,133.595 141.176,133.4
  other v1: 148.35,133.6
I2C2_SDA: P9.23 P18.6 P20.100 U11.9 | length 139.1
  Top Layer w0.21: P18.6@120.15,145.7 120.85,145.7 v1(122.35,144.2) ; P18.6@120.911,145.344 cw(c120.911,144.632) 121.415,145.135 ; P18.6@121.186,145.619 ccw(c121.802,145.619) 121.366,145.184 ; v1@122.105,144.2 ccw(c121.514,144.2) 121.932,144.618 ccw(c122.35,145.036) v1@122.35,144.445 ; v1@140.955,134.255 148.155,134.255 148.2,134.3 149.434,134.3 ; v1@141.123,134.077 cw(c141.554,133.646) 141.554,134.255 ; v1@141.123,134.423 ccw(c141.529,134.829) 141.529,134.255 ; v1@156.176,156.626 cw(c155.154,155.604) 156.6,155.604 ; v1@156.325,156.775 cw(c155.661,156.111) 156.6,156.111 ; v1@156.6,156.7 156.6,141.466 149.434,134.3 ; v1@158.877,127.477 ccw(c158.459,127.059) 158.459,127.65 ccw(c158.459,128.241) v1@158.877,127.823 ; v1(159.05,127.65) 151.87,127.65 149,130.52 149,133.324 149.005,133.329 149.005,133.871 149.434,134.3 ; v1@173.4,124.355 cw(c173.4,123.764) 173.818,124.182 cw(c174.236,124.6) v1@173.645,124.6 ; v1(173.4,124.6) 173.9,124.1 P20.100@177.2,124.1 ; P20.100@176.347,123.997 ccw(c176.1,123.75) 176.1,124.1 ccw(c176.1,124.45) P20.100@176.347,124.203
  Bottom Layer w0.21: P9.23@104.445,144.958 105.5,146.013 ; P9.23@104.458,145.393 ccw(c104.487,146.339) 105.156,145.669 ccw(c105.826,145) P9.23@104.88,144.971 ; P9.23@104.465,145.603 ccw(c104.508,147.005) 105.5,146.013 ; P9.23@105.09,144.978 cw(c106.492,145.021) 105.5,146.013 ; 121.846,143.746 cw(c122.35,143.243) 122.35,143.955 cw(c122.35,142.398) 123.451,143.499 ; 121.967,143.867 ccw(c121.634,144.2) v1@122.105,144.2 ; v1@122.25,144.15 121.45,143.35 111.25,143.35 109.642,144.958 108.477,144.958 107.422,146.013 105.5,146.013 ; v1@122.262,144.138 122.324,144.2 v1(122.35,144.2) 122.75,144.2 ; v1@122.35,144.165 cw(c122.35,143.115) 123.093,143.857 ; v1@122.35,144.375 cw(c122.35,143.832) 122.734,144.216 ; v1@122.568,144.089 cw(c122.75,143.996) 122.75,144.2 ; v1@122.568,144.311 ccw(c122.75,144.404) 122.75,144.2 ; 140.309,134.76 ccw(c140.95,135.401) v1@140.95,134.495 ; 140.624,134.446 cw(c140.428,134.25) v1@140.705,134.25 ; v1@140.72,134.35 139.85,135.22 139.43,135.22 138.693,135.957 138.688,135.957 138.207,136.438 135.598,136.438 133.561,138.475 128.745,138.475 124.275,142.945 124.128,142.945 123.758,143.315 123.635,143.315 122.75,144.2 ; v1(156.35,156.8) 156.35,156.83 157.8,158.28 158,158.48 158,160.12 ; v1@156.35,157.045 ccw(c156.35,157.564) 156.717,157.197 ; v1@156.595,156.8 cw(c157.258,156.8) 156.789,157.269 ; 157.99,160.13 157.99,161.64 158.5,162.15 U11.9@158.75,162.15 ; 158.369,162.019 cw(c158.602,161.786) U11.9@158.602,162.115 ; v1@159.05,127.405 cw(c159.05,126.814) 159.468,127.232 cw(c159.886,127.65) v1@159.295,127.65 ; v1(159.05,127.65) 162.1,124.6 v1(173.4,124.6) ; v1@173.227,124.427 ccw(c172.809,124.009) 172.809,124.6 ccw(c172.809,125.191) v1@173.227,124.773
  other v1: 140.95,134.25
I2C3_SCL: P12.14 P20.96 U8.5 | length 166.3
  Top Layer w0.2: v1@104.2,172.25 ccw(c103.596,172.25) 104.023,172.677 ccw(c104.45,173.104) v1@104.45,172.5 ; v1(104.45,172.25) 100.9,175.8 100.9,181.3 101.3,181.7 104.7,181.7 107.65,184.65 115.65,184.65 v1@116.35,183.95 ; v1@106.1,169.75 cw(c106.1,169.146) 106.527,169.573 cw(c106.954,170) v1@106.35,170 ; v1(106.1,170) 106.8,169.3 106.8,167.43 106.65,167.281 106.65,163.2 ; 106.9,162.95 cw(c106.434,162.484) P12.14@107.093,162.484 ; 106.968,162.882 ccw(c107.448,163.362) P12.14@107.483,162.684 ; P12.14@107.45,162.4 106.65,163.2 ; P12.14@107.473,162.883 cw(c107.417,163.967) 106.65,163.2 ; 115.803,184.497 ccw(c116.4,185.095) v1@116.4,184.25 ; 116.044,184.256 cw(c115.788,184) v1@116.15,184 ; v1@148.263,135.809 ccw(c147.731,136.619) 148.7,136.619 ; v1@148.373,135.642 ccw(c147.974,136.248) 148.7,136.248 ; v1@148.4,135.5 148.7,135.8 ; v1@148.482,135.475 ccw(c148.218,135.877) 148.7,135.877 ; v1@148.559,135.793 ccw(c148.626,135.874) 148.7,135.8 ; v1@148.647,135.638 cw(c148.832,135.667) 148.7,135.8 ; 149.55,161.134 cw(c150.666,161.134) v1@149.877,161.923 ; 149.55,161.617 cw(c150.183,161.617) v1@149.735,162.065 ; v1(149.7,162.1) 149.55,161.95 149.55,157.15 152.8,153.9 152.8,153.466 154.3,151.966 154.3,142.6 153.835,142.135 153.835,141.754 148.7,136.619 ; v1@173.4,126.25 cw(c173.4,125.646) 173.827,126.073 cw(c174.254,126.5) v1@173.65,126.5 ; v1(173.4,126.5) 174.2,125.7 P20.96@177.2,125.7 ; P20.96@176.344,125.594 ccw(c176.088,125.338) 176.088,125.7 ccw(c176.088,126.062) P20.96@176.344,125.806 ; 148.7,135.8 148.7,136.619
  Bottom Layer w0.2: v1@104.45,172 cw(c104.45,171.396) 104.877,171.823 cw(c105.304,172.25) v1@104.7,172.25 ; v1(104.45,172.25) 105.6,171.1 105.6,170.5 v1(106.1,170) ; v1@105.85,170 ccw(c105.246,170) 105.673,170.427 ccw(c106.1,170.854) v1@106.1,170.25 ; v1(116.4,184) 116.77,183.63 ; v1@116.426,183.751 cw(c116.471,183.331) 116.77,183.63 ; v1@116.649,183.974 ccw(c117.069,183.929) 116.77,183.63 ; U8.5@117.675,183.625 118.325,183.625 119.2,184.5 122.83,184.5 122.868,184.538 126.623,184.538 130.061,181.1 136.95,181.1 141.5,176.55 141.5,169.7 149.1,162.1 ; U8.5@117.755,183.63 116.77,183.63 ; v1(148.4,135.6) 151.031,135.6 151.631,136.2 162.5,136.2 172.2,126.5 v1(173.4,126.5) ; v1@148.577,135.423 cw(c149.004,134.996) 149.004,135.6 cw(c149.004,136.204) v1@148.577,135.777 ; v1@149.522,161.924 ccw(c149.1,161.505) 149.1,162.1 ; v1@149.522,162.276 cw(c149.1,162.695) 149.1,162.1 ; v1(149.7,162.1) 149.1,162.1 ; v1@173.223,126.323 ccw(c172.796,125.896) 172.796,126.5 ccw(c172.796,127.104) v1@173.223,126.677
I2C3_SDA: P11.15 P20.94 U8.4 | length 161.8
  Top Layer w0.2: v1(147.5,136.1) 147.965,136.565 148.08,136.565 153.435,141.92 153.435,142.301 153.9,142.766 153.9,151.8 148.9,156.8 148.9,160.619 148.8,160.719 148.8,163.3 ; v1@147.5,136.35 ccw(c147.5,136.954) 147.927,136.527 ccw(c148.354,136.1) v1@147.75,136.1 ; 148.8,162.272 cw(c150.428,162.272) v1@149.277,163.423 ; 148.8,162.755 cw(c149.945,162.755) v1@149.135,163.565 ; 148.8,163.238 cw(c149.462,163.238) v1@148.994,163.706 ; v1@148.86,163.531 cw(c148.634,163.466) 148.8,163.3 ; v1@149.031,163.36 ccw(c148.966,163.134) 148.8,163.3 ; v1(149.1,163.6) 148.8,163.3 ; v1@173.4,127.25 cw(c173.4,126.284) 174.083,126.967 ; v1@173.4,127.45 cw(c173.4,126.967) 173.741,127.309 ; v1(173.4,127.5) 173.55,127.5 174.55,126.5 P20.94@177.2,126.5 ; v1@173.65,127.5 ccw(c173.891,127.5) 173.721,127.329 ; P20.94@176.344,126.394 ccw(c176.088,126.138) 176.088,126.5 ccw(c176.088,126.862) P20.94@176.344,126.606
  Bottom Layer w0.2: P11.15@104.36,163.949 ccw(c104.471,164.46) 104.841,164.091 ; P11.15@104.403,164.145 ccw(c104.563,164.887) 105.1,164.35 ; P11.15@104.45,163.7 105.1,164.35 ; P11.15@104.718,163.754 cw(c105.235,163.754) 104.869,164.119 ; U8.4@114.37,183.665 ccw(c114.055,183.98) 114.5,183.98 ; U8.4@114.384,183.676 ccw(c114.303,183.855) 114.5,183.855 ; U8.4@114.6,183.6 114.6,183.755 114.5,183.855 ; v1(147.5,136.1) 147.7,136.3 150.7,136.3 151,136.6 163,136.6 172.1,127.5 v1(173.4,127.5) ; v1@147.535,136.065 cw(c148.104,135.496) 148.104,136.3 ; v1@147.677,135.923 cw(c148.586,135.014) 148.586,136.3 ; v1@148.85,163.6 ccw(c148.246,163.6) 148.673,164.027 ccw(c149.1,164.454) v1@149.1,163.85 ; v1(149.1,163.6) 141.9,170.8 141.9,176.716 137.116,181.5 130.566,181.5 127.128,184.938 114.638,184.938 114.5,184.8 ; v1@173.223,127.323 ccw(c172.796,126.896) 172.796,127.5 ccw(c172.796,128.104) v1@173.223,127.677 ; 105.1,164.35 105.1,164.675 105.118,164.693 105.118,165.355 105.1,165.373 105.1,165.945 105.118,165.963 105.118,166.625 104.649,167.094 104.086,167.094 103.2,167.98 103.2,168.269 102.819,168.65 102.581,168.65 100.9,170.331 100.9,181.45 101.15,181.7 104.9,181.7 108,184.8 114.5,184.8 ; 114.5,183.855 114.5,184.8
I2C4_SCL: P20.44
I2C4_SDA: P20.42
ISEL: R36.2 U7.13 | length 5.6
  Top Layer w0.2: U7.13@126.504,167.35 127.873,167.35 128.273,167.75 128.74,167.75 129.05,168.06 R36.2@129.05,169.4 129.05,169.65 R36.2@129,169.7 ; R36.2@128.838,169.188 cw(c128.326,168.676) 129.05,168.676 cw(c129.774,168.676) R36.2@129.262,169.188
MCBSP1_CLKR: P9.20 P19.58 | length 50
  Top Layer w0.21: v1@131.176,133.823 ccw(c130.638,134.362) 131.4,134.362 ; v1(131.35,133.65) 131.4,133.7 131.4,134.906 ; 131.4,134.121 ccw(c131.821,134.121) v1@131.523,133.823 ; 131.4,134.906 131.4,138.8 133.45,140.85 P19.58@134.95,140.85 ; 133.579,140.85 ccw(c133.579,141.371) P19.58@133.947,141.003
  Bottom Layer w0.21: P9.20@106.985,139.233 cw(c106.985,138.806) 107.287,139.108 ; P9.20@106.985,139.878 106.985,139.41 108.45,137.945 108.45,136.82 114.885,130.385 119.557,130.385 120.717,131.545 122.936,131.545 123.534,130.947 128.447,130.947 v1@131.3,133.8 ; P9.20@107,139.878 ccw(c108.166,139.878) 107.342,139.053 ; P9.20@107.21,139.878 ccw(c108.883,139.878) 107.7,138.695 ; P9.20@107.42,139.878 ccw(c109.6,139.878) 108.059,138.336 ; P9.20@107.63,139.878 ccw(c110.317,139.878) 108.417,137.978 ; 130.59,133.09 cw(c131.35,132.33) v1@131.35,133.405 ; 130.949,133.449 cw(c131.35,133.047) v1@131.35,133.615 ; v1(131.35,133.65) v1@131.4,133.7 ; v1@131.4,133.7 v1@131.3,133.8 ; v1@131.4,133.9 v1@131.3,133.8
MCBSP1_CLKX: P9.14 P19.60 | length 47.4
  Top Layer w0.21: v1(132.25,128.806) 132.25,129.05 132.7,129.5 132.7,132.336 132.05,132.986 132.05,133.424 132.055,133.428 132.055,133.971 132.05,133.976 132.05,138.231 133.969,140.15 P19.60@134.75,140.15 ; v1@132.285,128.812 cw(c132.736,128.888) 132.412,129.212 ; v1@132.492,128.847 cw(c133.228,128.972) 132.7,129.5
  Bottom Layer w0.21: P9.14@106.985,131.613 cw(c106.985,130.056) 108.086,131.157 cw(c109.187,132.258) P9.14@107.63,132.258 ; P9.14@106.985,131.823 cw(c106.985,130.773) 107.728,131.515 cw(c108.47,132.258) P9.14@107.42,132.258 ; P9.14@106.985,132.258 111.323,127.92 116.201,127.92 116.206,127.925 120.88,127.925 121.34,127.465 124.306,127.465 124.311,127.47 129.87,127.47 130.24,127.84 130.24,127.859 131.196,128.815 132.241,128.815 v1(132.25,128.806) ; 131.637,128.815 cw(c131.637,128.193) v1@132.077,128.633 ; 131.68,128.815 ccw(c131.68,129.376) v1@132.077,128.979
MCBSP1_DR: P9.18 P19.50 | length 49.4
  Top Layer w0.21: v1(131.2,131.75) 131.164,131.75 129.1,133.814 129.1,140.1 133.1,144.1 P19.50@134.8,144.1 ; P19.50@133.947,143.997 ccw(c133.7,143.75) 133.7,144.1 ccw(c133.7,144.45) P19.50@133.947,144.203
  Bottom Layer w0.21: P9.18@106.985,137.338 106.985,137.126 114.551,129.56 115.521,129.56 115.526,129.565 119.896,129.565 121.056,130.725 122.596,130.725 123.231,130.09 129.04,130.09 130.95,132 v1(131.2,131.75) ; 129.928,130.978 cw(c131.2,129.706) v1@131.2,131.505 ; 130.287,131.337 cw(c131.2,130.423) v1@131.2,131.715 ; 130.645,131.695 cw(c131.2,131.14) v1@131.2,131.925
MCBSP1_DX: P9.12 P19.52 | length 52.9
  Top Layer w0.21: 131.353,127.897 ccw(c131.6,128.144) v1@131.6,127.795 ; v1@131.355,127.561 ccw(c130.636,127.596) 131.145,128.105 ; v1(131.6,127.55) 131.595,127.554 131.595,127.655 131.145,128.105 ; P19.52@133.947,143.197 ccw(c133.7,142.95) 133.7,143.3 ccw(c133.7,143.65) P19.52@133.947,143.403 ; P19.52@134.25,143.3 132.88,143.3 129.51,139.93 129.51,133.983 131.088,132.405 131.471,132.405 131.855,132.021 131.855,131.479 131.145,130.769 131.145,128.105
  Bottom Layer w0.21: P9.12@106.985,129.073 cw(c106.985,127.516) 108.086,128.617 cw(c109.187,129.718) P9.12@107.63,129.718 ; P9.12@106.985,129.283 cw(c106.985,128.233) 107.728,128.975 cw(c108.47,129.718) P9.12@107.42,129.718 ; P9.12@106.985,129.718 109.603,127.1 116.54,127.1 116.545,127.105 120.541,127.105 121.001,126.645 124.646,126.645 124.651,126.65 130.21,126.65 130.48,126.92 130.97,126.92 v1(131.6,127.55) ; v1@131.355,127.55 cw(c130.763,127.55) 131.181,127.131 cw(c131.6,126.713) v1@131.6,127.305
MCBSP1_FSR: P9.22 P19.54 | length 47.8
  Top Layer w0.21: v1(130.3,134.5) 130.1,134.7 130.1,139.3 133.3,142.5 P19.54@134.8,142.5 ; P19.54@133.947,142.397 ccw(c133.7,142.15) 133.7,142.5 ccw(c133.7,142.85) P19.54@133.947,142.603
  Bottom Layer w0.21: P9.22@106.985,141.773 cw(c106.985,140.216) 108.086,141.317 cw(c109.187,142.418) P9.22@107.63,142.418 ; P9.22@106.985,141.983 cw(c106.985,140.933) 107.728,141.675 cw(c108.47,142.418) P9.22@107.42,142.418 ; P9.22@106.985,142.418 109.59,139.813 109.59,136.96 114.59,131.96 117.223,131.96 118.177,132.914 122.726,132.914 123.83,131.81 127.66,131.81 130.3,134.45 v1(130.3,134.5) ; 129.846,133.996 ccw(c129.343,134.5) v1@130.055,134.5 ; 129.967,134.117 cw(c130.3,133.784) v1@130.3,134.255
MCBSP1_FSX: P9.16 P19.56 | length 51.1
  Top Layer w0.21: v1@131.692,130.67 ccw(c131.606,130.844) 131.8,130.844 ; v1(131.8,130.45) 131.8,130.844 ; v1@131.834,130.458 cw(c132.44,130.603) 131.999,131.043 ; v1@131.908,130.67 cw(c131.994,130.844) 131.8,130.844 ; v1@132.038,130.507 cw(c132.869,130.705) 132.265,131.309 ; P19.56@133.947,141.597 ccw(c133.7,141.35) 133.7,141.7 ccw(c133.7,142.05) P19.56@133.947,141.803 ; P19.56@134.8,141.7 133.35,141.7 130.75,139.1 130.75,134.976 130.955,134.771 130.955,134.228 130.695,133.968 130.695,133.378 131.258,132.815 131.641,132.815 132.265,132.191 132.265,131.309 ; 131.8,130.844 132.265,131.309
  Bottom Layer w0.21: P9.16@106.985,134.153 cw(c106.985,132.596) 108.086,133.697 cw(c109.187,134.798) P9.16@107.63,134.798 ; P9.16@106.985,134.363 cw(c106.985,133.313) 107.728,134.055 cw(c108.47,134.798) P9.16@107.42,134.798 ; P9.16@106.985,134.798 113.043,128.74 115.861,128.74 115.866,128.745 120.236,128.745 121.396,129.905 122.256,129.905 122.706,129.456 ; 122.7,129.45 122.88,129.27 130.491,129.27 131.671,130.45 v1(131.8,130.45) ; 131.162,129.941 cw(c131.8,129.302) v1@131.8,130.205 ; 131.473,130.252 ccw(c131.275,130.45) v1@131.555,130.45
MCBSP2_CLKX: P19.67 RR16.1 | length 38.8
  Top Layer w0.21: P19.67@139.3,136.9 144.9,136.9 150.25,142.25 150.3,142.25 150.55,142.5 v1(150.4,142.5) ; P19.67@140.053,136.797 cw(c140.3,136.55) 140.3,136.9 cw(c140.3,137.25) P19.67@140.053,137.003 ; 149.911,141.911 ccw(c149.322,142.5) v1@150.155,142.5 ; 150.152,142.152 cw(c150.4,141.905) v1@150.4,142.255
  Bottom Layer w0.21: v1(150.4,142.5) 150.736,142.5 155.53,147.294 155.53,152.814 157.006,154.29 162.54,154.29 164.211,155.961 RR16.1@164.211,156.591 ; RR16.1@164.144,156.224 cw(c163.982,156.062) 164.211,156.062 cw(c164.44,156.062) RR16.1@164.278,156.224
MCBSP2_DR: P19.69 RR16.4 | length 39.9
  Top Layer w0.21: P19.69@139.2,136.1 144.7,136.1 150.44,141.84 150.47,141.84 150.475,141.845 150.671,141.845 151.055,142.228 151.055,142.922 151.05,142.926 v1(151.05,144.9) ; P19.69@140.053,135.997 cw(c140.3,135.75) 140.3,136.1 cw(c140.3,136.45) P19.69@140.053,136.203 ; v1@150.877,144.727 cw(c150.459,144.309) 151.05,144.309 cw(c151.641,144.309) v1@151.223,144.727
  Bottom Layer w0.21: v1(151.05,144.9) 154.3,148.15 154.3,153.33 156.62,155.65 161.472,155.65 ; v1@151.05,145.145 ccw(c151.05,145.736) 151.468,145.318 ccw(c151.886,144.9) v1@151.295,144.9 ; RR16.4@161.716,156.286 cw(c160.88,156.242) 161.472,155.65 ; RR16.4@161.744,156.224 cw(c161.582,156.062) 161.811,156.062 cw(c162.04,156.062) RR16.4@161.878,156.224 ; 161.806,155.984 ccw(c161.514,156.275) RR16.4@161.926,156.297 ; RR16.4@161.811,156.591 161.811,155.989 161.472,155.65
MCBSP2_DX: P19.63 RR16.3 | length 38.6
  Top Layer w0.21: P19.63@139.15,138.5 144.6,138.5 146.5,140.4 ; P19.63@140.053,138.397 cw(c140.3,138.15) 140.3,138.5 cw(c140.3,138.85) P19.63@140.053,138.603 ; 146.211,140.111 cw(c146.8,139.522) v1@146.8,140.355 ; 146.452,140.352 ccw(c146.205,140.6) v1@146.555,140.6 ; v1@146.557,140.568 cw(c146.358,140.542) 146.5,140.4 ; v1@146.647,140.408 ccw(c146.578,140.322) 146.5,140.4 ; v1@146.8,140.4 146.5,140.4
  Bottom Layer w0.21: v1@146.8,140.635 ccw(c146.8,141.13) 147.15,140.78 ; v1@146.8,140.845 ccw(c146.8,141.847) 147.509,141.139 ; v1@146.82,140.45 148.745,142.375 148.745,142.721 149.674,143.65 150.726,143.65 151.705,144.629 151.705,144.655 154.71,147.66 154.71,153.16 156.75,155.2 161.75,155.2 162.611,156.061 ; 162.286,155.736 ccw(c161.731,156.291) RR16.3@162.516,156.291 ; RR16.3@162.544,156.224 cw(c162.382,156.062) 162.611,156.062 ; RR16.3@162.611,156.591 162.611,156.061 ; RR16.3@162.678,156.224 ccw(c162.84,156.062) 162.611,156.062
  other v1: 146.8,140.6
MCBSP2_FSX: P19.65 RR16.2 | length 38.7
  Top Layer w0.21: P19.65@139.15,137.65 145.07,137.65 149.35,141.93 149.35,142.4 v1(149.4,142.45) ; P19.65@140.053,137.803 ccw(c140.421,138.171) 140.421,137.65
  Bottom Layer w0.21: v1(149.4,142.45) 150.19,143.24 150.896,143.24 155.12,147.464 155.12,152.984 156.836,154.7 162.1,154.7 163.411,156.011 RR16.2@163.411,156.591 ; v1@149.4,142.695 ccw(c149.4,143.286) 149.818,142.868 ccw(c150.236,142.45) v1@149.645,142.45 ; 163.051,155.651 ccw(c162.411,156.291) RR16.2@163.316,156.291 ; RR16.2@163.344,156.224 cw(c163.182,156.062) 163.411,156.062 cw(c163.64,156.062) RR16.2@163.478,156.224 ; 163.409,156.009 ccw(c163.128,156.291) RR16.2@163.526,156.291
MCBSP3_CLKX: P9.6 P20.93 | length 90
  Top Layer w0.21: v1(157.2,124) 160.9,124 v1(161,123.9) ; v1@157.373,123.827 cw(c157.791,123.409) 157.791,124 cw(c157.791,124.591) v1@157.373,124.173 ; 160.167,124 cw(c160.167,123.067) v1@160.827,123.727 ; 160.65,124 ccw(c160.65,124.25) v1@160.827,124.073 ; v1(177.25,123.15) 178.1,123.15 178.545,123.595 178.545,124.545 180.5,126.5 ; v1@177.423,122.977 cw(c177.841,122.559) 177.841,123.15 cw(c177.841,123.741) v1@177.423,123.323 ; 180.005,126.005 cw(c180.85,125.16) P20.93@180.85,126.355 ; 180.363,126.363 cw(c180.85,125.877) P20.93@180.85,126.565 ; P20.93@180.747,126.397 ccw(c180.5,126.15) 180.5,126.5 ; P20.93@180.747,126.603 cw(c180.5,126.85) 180.5,126.5 ; P20.93@181.6,126.5 180.5,126.5
  Bottom Layer w0.21: P9.6@106.985,122.098 110.998,122.098 112.04,123.14 119.174,123.14 119.434,122.88 119.434,122.866 119.625,122.675 125.061,122.675 125.065,122.67 125.61,122.67 126.265,123.325 143.935,123.325 144.12,123.14 156.34,123.14 v1(157.2,124) ; P9.6@107.293,121.79 cw(c108.035,121.048) 108.035,122.098 cw(c108.035,123.148) P9.6@107.293,122.406 ; P9.6@107.441,121.642 cw(c108.542,120.541) 108.542,122.098 cw(c108.542,123.655) P9.6@107.441,122.554 ; v1@156.955,124 cw(c156.364,124) 156.782,123.582 cw(c157.2,123.164) v1@157.2,123.755 ; v1(161,123.9) 175.05,123.9 175.88,123.07 176.19,123.07 176.21,123.05 177.15,123.05 v1(177.25,123.15) ; v1@161.173,123.727 cw(c161.591,123.309) 161.591,123.9 cw(c161.591,124.491) v1@161.173,124.073 ; 176.417,123.05 ccw(c176.417,123.983) v1@177.077,123.323 ; 176.9,123.05 cw(c176.9,122.8) v1@177.077,122.977